# Altium PCB RS232.PcbDoc
Units mm, origin at the board's own origin, x right, y up, seen from the top; angles counter-clockwise.
Board outline 73.53 x 40.89 mm, 2 copper layers (Top Layer, Bottom Layer); 13 components, 21 nets, 53 pads, 20 vias.
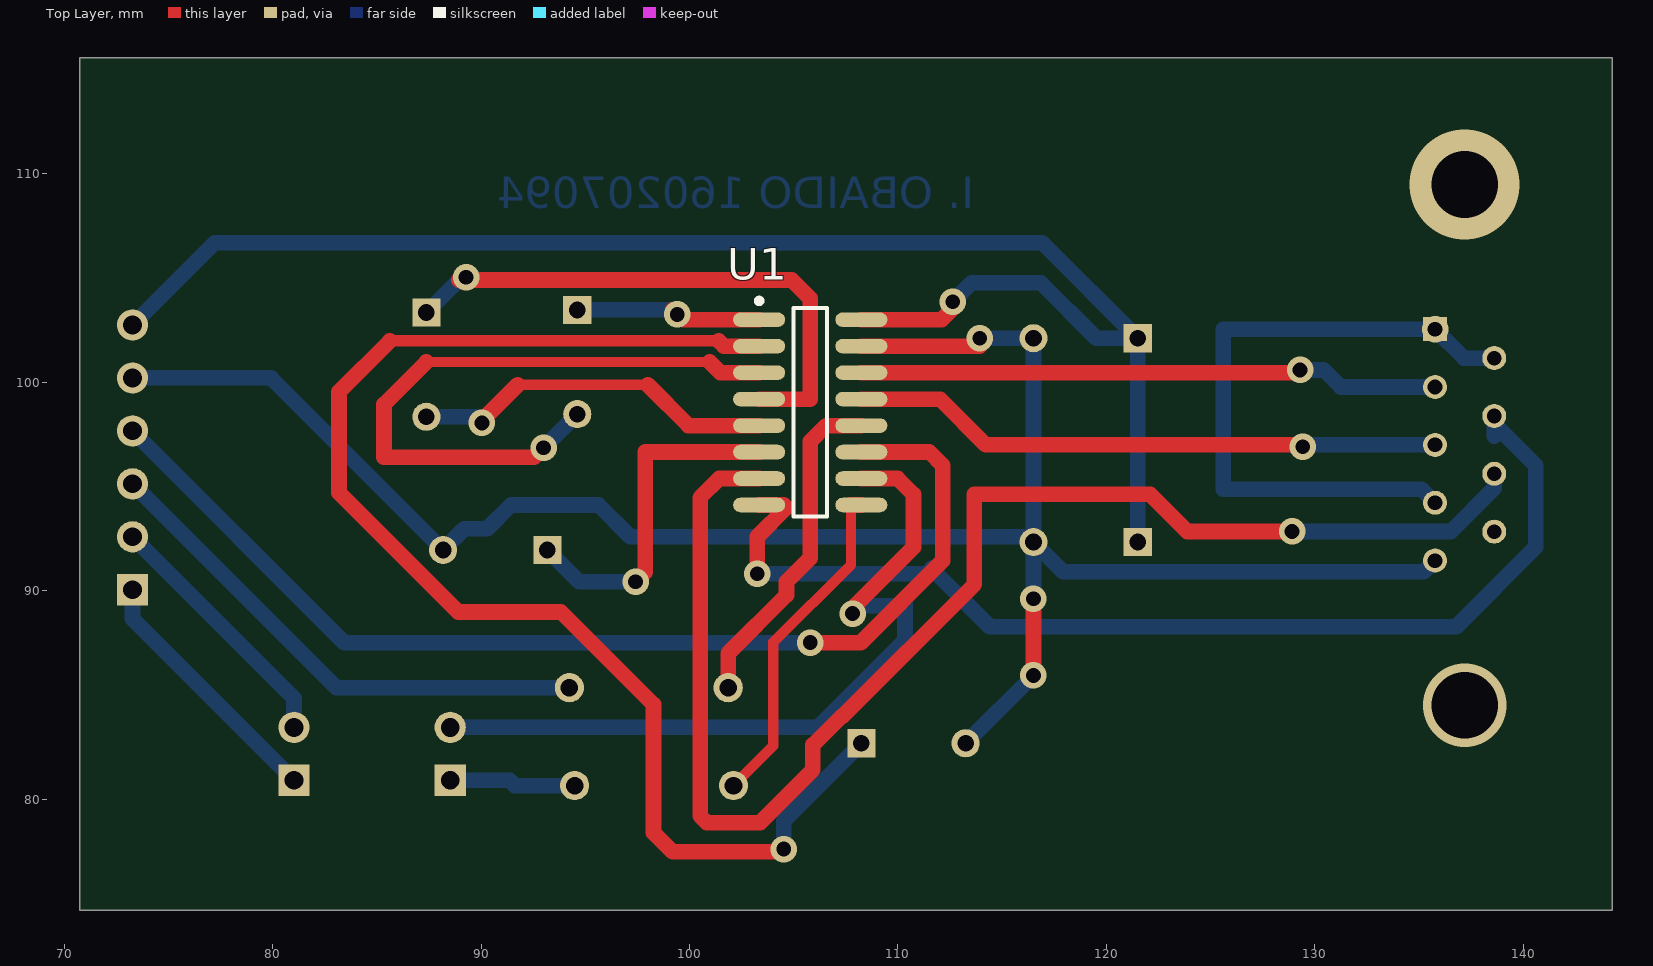
[diagram p0: Top Layer view]
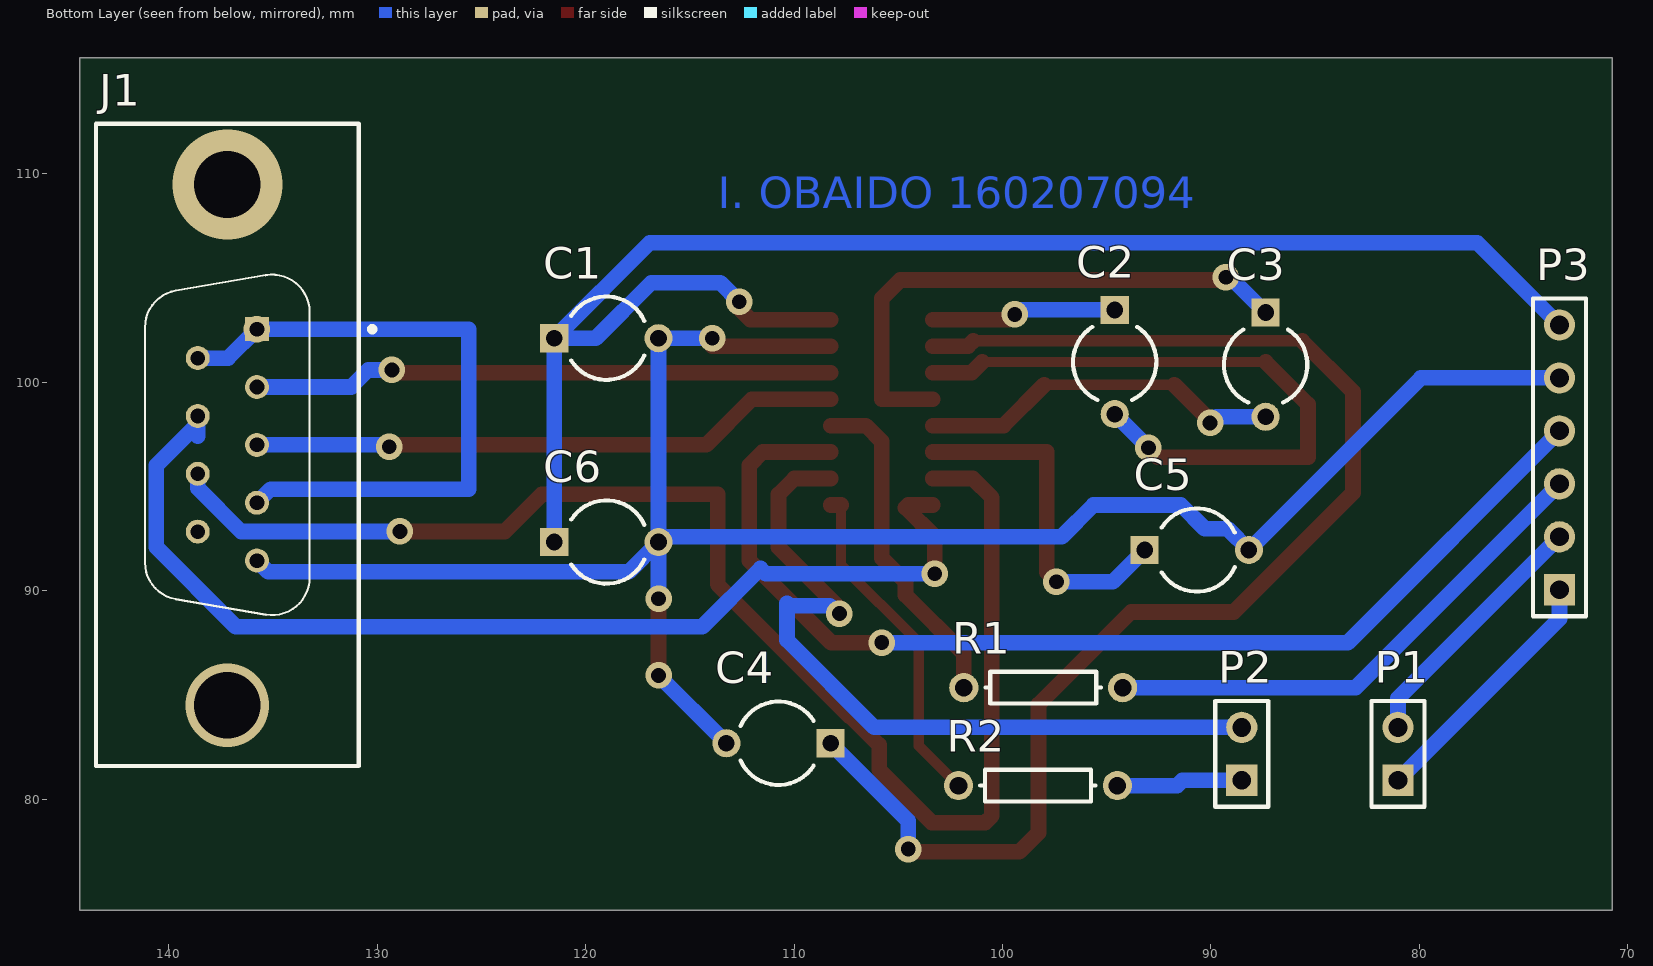
[diagram p1: Bottom Layer view, seen from below]

## Layer stack, top to bottom
Top Solder: solder mask 0.0102, Solder Resist, Dk 3.5
Top Layer: signal copper 0.0356
Dielectric 1: dielectric 0.32, FR-4, Dk 4.8
Bottom Layer: signal copper 0.0356
Bottom Solder: solder mask 0.0102, Solder Resist, Dk 3.5

## Board outline
70.739,74.676 144.272,74.676 144.272,115.57 70.739,115.57

## Design rules (kind name [scope] priority, off if disabled: settings)
Clearance [All] p1: gap=0.254 ignorepadtopadclearanceinfootprint=FALSE except(0: Arc-Hole Track-Hole SMDPad-Hole THPad-Hole Via-Hole Fill-Hole Poly-Hole Region-Hole Text-Hole)
PolygonConnect [All] p1: connectstyle=Relief reliefconductorwidth=0.254 reliefentries=4 polygonreliefangle="90 Angle" airgapwidth=0.254
RoutingVias [All] p1: holewidth=0.711 width=1.27 viastyle="Through Hole" minholewidth=0.711 minwidth=1.27 maxholewidth=0.711 maxwidth=1.27
SolderMaskExpansion [All] p1: expansion=0.102 istentingtop=FALSE
Width [All] p1: maxlimit=1.5 minlimit=0.5 preferedwidth=0.75 minimp=50.000000 maximp=50.000000 favimp=50.000000
30 further rules are at their usual default settings.

## Components (designator, comment, footprint, x,y, rotation, side; value= is the part's Value field where it differs from the comment)
C1 "Cap2" CAPR5-4X5 118.999,102.108 r180 bottom value=0.1uf
C2 "" CAPR5-4X5 94.615,100.965 r270 bottom value=0.1uf
C3 "" CAPR5-4X5 87.376,100.838 r270 bottom value=0.1uf
C4 "" CAPR5-4X5 110.744,82.677 r0 bottom value=0.1uf
C5 "" CAPR5-4X5 90.678,91.948 r180 bottom value=0.1uf
C6 "Cap2" CAPR5-4X5 118.999,92.329 r180 bottom
J1 "070906FS009F100ZU" 070906FS009 137.183,96.99 r270 bottom
P1 "Header 2" HDR1X2 81.026,80.899 r90 bottom
P2 "Header 2" HDR1X2 88.519,80.899 r90 bottom
P3 "Header 6" HDR1X6 73.279,90.043 r90 bottom
R1 "Res1" AXIAL-0.3 98.044,85.344 r0 bottom value=100
R2 "" AXIAL-0.3 98.298,80.645 r0 bottom value=100
U1 "MAX232ECWE+" SO16_L 105.791,98.552 r0 top

## Footprints (in the part's own frame and the unit in brackets; to place one, negate y for a bottom-side part, rotate by r counter-clockwise, add the part's x,y. Pads: shape width x height; smd on the part's side, far side on the other; paste and mask are expansions set on the pad)
070906FS009 [mm] "Connector; D-Sub, Thru-Hole; 9 Position; Vertical; Body 30.81x9.60mm (LxW)"
  rect 1.15x1.15 hole 0.7: 1(-5.55,1.42)
  round 1.15 hole 0.7: 2(-2.775,1.42) 3(0,1.42) 4(2.775,1.42) 5(5.55,1.42) 6(-4.163,-1.42) 7(-1.388,-1.42) 8(1.388,-1.42) 9(4.163,-1.42)
  round 2.9 hole 3.2: MH1(-12.495,0) MH2(12.495,0)
  silkscreen extent -15.4,-6.3 15.4,7.07, body extent -15.4,-6.3 15.4,6.3, height 8.4
AXIAL-0.3 [mm] "Axial Device, Thru-Hole; 2 Leads; 0.3 in Pin Spacing"
  round 1.4 hole 0.85: 1(-3.81,0) 2(3.81,0)
  silkscreen extent -2.77,-0.76 2.77,0.76
CAPR5-4X5 [mm] "Capacitor; 2 Leads"
  rect 1.35x1.35 hole 0.8: 1(-2.5,0)
  round 1.35 hole 0.8: 2(2.5,0)
  silkscreen extent -1.69,-2 1.82,2
HDR1X2 [mm] "Connector; Header; 2 Position"
  rect 1.5x1.5 hole 0.9: 1(0,0)
  round 1.5 hole 0.9: 2(2.54,0)
  silkscreen extent -1.27,-1.27 3.81,1.27
HDR1X6 [mm] "Connector; Header; 6 Position"
  rect 1.5x1.5 hole 0.9: 1(0,0)
  round 1.5 hole 0.9: 2(2.54,0) 3(5.08,0) 4(7.62,0) 5(10.16,0) 6(12.7,0)
  silkscreen extent -1.27,-1.27 13.97,1.27
SO16_L [mm] "SOIC, 16-Leads, Body 9.9x3.9mm, Pitch 1.27mm, IPC High Density"
  oval 2.5x0.7 smd: 1(-2.45,4.445) 2(-2.45,3.175) 3(-2.45,1.905) 4(-2.45,0.635) 5(-2.45,-0.635) 6(-2.45,-1.905) 7(-2.45,-3.175) 8(-2.45,-4.445) 9(2.45,-4.445) 10(2.45,-3.175) 11(2.45,-1.905) 12(2.45,-0.635) 13(2.45,0.635) 14(2.45,1.905) 15(2.45,3.175) 16(2.45,4.445)
  silkscreen extent -2.57,-5 0.8,5.47, body extent -2,-5 2,5, height 1.75

## Part data
C1 C6: "Capacitor", PackageDescription="Capacitor; 2 Leads", PackageReference=CAPR5-4X5, Published=23-Sep-2002, Publisher="Altium Limited"
  C6: =2.2uF
C2 C3 C4 C5: library part Cap2, "Capacitor", PackageDescription="Capacitor; 2 Leads", PackageReference=CAPR5-4X5, Published=23-Sep-2002, Publisher="Altium Limited"
J1: "Ultra Thin D-Sub, Straight Dip Type, Female Connector, THT, 9 Position, 2.2mm Pin Length", ComponentLink1Description="Manufacturer Link", ComponentLink1URL=http://www.suyin.com/, ComponentLink2Description=Datasheet, ComponentLink2URL=http://www.suyin.at/pdf/i_o/d_sub/female/straight/070906FS.pdf, DatasheetVersion=May-2003, DrillSize="Corresponds to nominal value.", PackageDescription="Connector; D-Sub, Thru-Hole; 9 Position; Vertical; Body 30.81 x 9.60 x 8.20 mm (LxWxH)", PackageReference=070906FS009, PackageVersion="revK, Nov-2007", PCB_Layout="Complies with manufacturer's recommendation.", Published=26-Sep-2008, Publisher="Altium Limited"
P1 P2: "Header, 2-Pin", LatestRevisionDate=17-Jul-2002, LatestRevisionNote="Re-released for DXP Platform.", Publisher="Altium Limited"
P3: "Header, 6-Pin", LatestRevisionDate=17-Jul-2002, LatestRevisionNote="Re-released for DXP Platform.", Publisher="Altium Limited"
R1: "Resistor", LatestRevisionDate=17-Jul-2002, LatestRevisionNote="Re-released for DXP Platform.", PackageDescription="Axial Device, Thru-Hole; 2 Leads; 0.3 in Pin Spacing", PackageReference=AXIAL-0.3, Published=8-Jun-2000, Publisher="Altium Limited"
R2: library part Res1, "Resistor", LatestRevisionDate=17-Jul-2002, LatestRevisionNote="Re-released for DXP Platform.", PackageDescription="Axial Device, Thru-Hole; 2 Leads; 0.3 in Pin Spacing", PackageReference=AXIAL-0.3, Published=8-Jun-2000, Publisher="Altium Limited"
U1: "Dual Transmitter/Receiver RS-232 16-Pin SOIC W", Package="SOIC-16 Maxim Integrated", Digi-Key_Part_Number=MAX232ECWE+-ND, Digi-Key_Purchase_URL=https://www.digikey.com.tr/product-detail/en/maxim-integrated/MAX232ECWE-/MAX232ECWE--ND/947838?utm_source=snapeda&utm_medium=aggregator&utm_campaign=symbol, MF="Maxim Integrated", MP=MAX232ECWE+, SnapEDA_Link=https://www.snapeda.com/parts/MAX232ECWE%2B/Maxim%20Integrated/view-part/?ref=snap

## Via types
v1: diameter 1.27, hole 0.711, Top Layer to Bottom Layer, 18 vias
v2: diameter 4, hole 0.711, Top Layer to Bottom Layer, 1 vias
v3: diameter 5.27, hole 0.711, Top Layer to Bottom Layer, 1 vias

## Nets (pads, with @x,y where several pads share a name; then routed paths per layer and width w, separated by ;. In a path a pad name is that pad's centre, name@x,y a point inside that pad or via, vN(x,y) a via of type N, cw(c..) or ccw(c..) an arc to the next point about the centre after c; other vN are vias at no path point)
GND: C1.2 C4.2 C5.2 C6.2 J1.5 P3.5 U1.15 | length 97.6
  Top Layer w0.75: U1.15 v1@113.919,101.727 ; v1(116.499,85.932) 116.499,89.488 116.379,89.488 v1(116.499,89.608)
  Bottom Layer w0.75: P3.5 79.923,100.203 C5.2 89.194,92.964 90.297,92.964 91.44,94.107 95.631,94.107 97.155,92.583 116.245,92.583 C6.2 ; C4.2 v1(116.499,85.932) ; v1(113.919,102.108) C1.2 C6.2 ; v1(116.499,89.608) C6.2 ; J1.5 135.23,90.907 117.921,90.907 C6.2
NetC1_1: C1.1 C6.1 P3.6 U1.16 | length 76.5
  Top Layer w0.75: U1.16 112.09,102.997 v1@112.624,103.53
  Bottom Layer w0.75: P3.6 77.216,106.68 116.927,106.68 C1.1 ; v1(112.624,103.861) 113.538,104.775 116.84,104.775 119.507,102.108 C1.1 ; C6.1 C1.1
NetC2_1: C2.1 U1.1 | length 8.9
  Top Layer w0.75: v1@99.198,103.465 99.666,102.997 U1.1
  Bottom Layer w0.75: C2.1 v1@99.198,103.465
  other v1: 99.412,103.251
NetC2_2: C2.2 U1.3 | length 31.7
  Top Layer w0.5: 87.376,100.965 100.965,100.965
  Top Layer w0.75: 87.376,100.965 85.344,98.933 85.344,96.393 92.543,96.393 v1(93,96.85) ; 100.965,100.965 101.473,100.457 U1.3
  Bottom Layer w0.75: v1(93,96.85) C2.2
NetC3_1: C3.1 U1.4 | length 26.7
  Top Layer w0.75: v1@88.94,104.902 104.902,104.902 105.791,104.013 105.791,99.187 U1.4
  Bottom Layer w0.75: C3.1 v1@88.94,104.902
  other v1: 89.281,105.029
NetC3_2: C3.2 U1.5 | length 17.4
  Top Layer w0.5: 91.756,99.873 97.993,99.873
  Top Layer w0.75: v1@90.221,98.338 91.756,99.873 ; 97.993,99.873 99.949,97.917 U1.5
  Bottom Layer w0.75: C3.2 89.749,98.338 v1(90.043,98.044)
NetC4_1: C4.1 U1.2 | length 64.9
  Top Layer w0.55: 85.623,101.981 101.397,101.981
  Top Layer w0.75: 85.623,101.981 83.185,99.543 83.185,94.691 88.9,88.976 93.828,88.976 98.269,84.535 98.269,78.388 99.187,77.47 104.394,77.47 v1(104.521,77.597) ; 101.397,101.981 101.651,101.727 U1.2
  Bottom Layer w0.75: v1(104.521,77.597) 104.521,78.954 C4.1
NetC5_1: C5.1 U1.6 | length 16.7
  Top Layer w0.75: v1(97.409,90.424) 97.877,90.892 97.877,96.647 U1.6
  Bottom Layer w0.75: C5.1 94.702,90.424 v1(97.409,90.424)
NetJ1_1: J1.1 J1.4 J1.6 | length 31.7
  Bottom Layer w0.75: J1.4 135.109,94.869 125.603,94.869 125.603,102.54 v1(135.763,102.54) 137.151,101.153 J1.6
NetJ1_2: J1.2 U1.14 | length 27.9
  Top Layer w0.75: U1.14 129.159,100.457 v1(129.286,100.584)
  Bottom Layer w0.75: v1(129.286,100.584) 130.429,100.584 131.248,99.765 J1.2
NetJ1_3: J1.3 U1.13 | length 28.5
  Top Layer w0.75: U1.13 112.014,99.187 114.211,96.99 v1@129.413,96.99
  Bottom Layer w0.75: v1(129.413,96.901) 129.502,96.99 J1.3
NetJ1_7: J1.7 U1.8 | length 53
  Top Layer w0.75: v1(103.251,90.805) 103.251,92.583 104.648,93.98 104.521,94.107 U1.8
  Bottom Layer w0.75: v1(103.251,90.805) 111.353,90.805 111.607,91.059 114.401,88.265 136.779,88.265 140.589,92.075 140.589,96.012 J1.7@138.603,97.998 ; 138.603,97.409 J1.7@138.603,97.998 ; J1.7 J1.7@138.603,97.998
NetJ1_8: J1.8 U1.7 | length 68.7
  Top Layer w0.75: U1.7 101.422,95.377 100.508,94.463 100.508,79.191 100.832,78.867 103.378,78.867 105.918,81.407 105.918,82.591 107.308,83.981 107.349,83.981 113.665,90.297 113.665,94.615 122.098,94.615 123.876,92.837 v1(128.905,92.837)
  Bottom Layer w0.75: v1(128.905,92.837) 136.525,92.837 138.603,94.915 J1.8
NetP1_1: P1.1 P3.1 | length 12.4
  Bottom Layer w0.75: P3.1 73.279,88.646 P1.1
NetP1_2: P1.2 P3.2 | length 12.4
  Bottom Layer w0.75: P3.2 81.026,84.836 P1.2
NetP2_1: P2.1 R2.1 | length 6.1
  Bottom Layer w0.75: P2.1 91.364,80.899 91.618,80.645 R2.1
NetP2_2: P2.2 U1.10 | length 37.8
  Top Layer w0.75: v1(107.823,88.9) 107.823,89.154 110.744,92.075 110.744,94.615 109.982,95.377 U1.10
  Bottom Layer w0.75: P2.2 106.147,83.439 110.338,87.63 110.338,89.383 110.236,89.281 108.28,89.281 107.899,88.9 v1(107.823,88.9)
NetP3_3: P3.3 R1.1 | length 25
  Bottom Layer w0.75: P3.3 83.058,85.344 R1.1
NetP3_4: P3.4 U1.11 | length 53.4
  Top Layer w0.75: v1(105.791,87.503) 108.214,87.503 112.141,91.43 112.141,96.012 111.506,96.647 U1.11
  Bottom Layer w0.75: P3.4 83.439,87.503 v1(105.791,87.503)
NetR1_2: R1.2 U1.12 | length 16.2
  Top Layer w0.75: R1.2 101.854,86.995 104.648,89.789 104.648,90.424 105.791,91.567 105.791,97.155 106.553,97.917 U1.12
NetR2_2: R2.2 U1.9 | length 16.3
  Top Layer w0.5: R2.2 104.013,82.55 104.013,87.513 107.747,91.246 U1.9@107.747,94.107
  Top Layer w0.75: U1.9@107.747,94.107 U1.9
pads on no net: J1.9 J1.MH1 J1.MH2
copper on no net:
  other v1: 137.16,84.201
  other v2: 137.183,84.495
  other v3: 137.183,109.485

## Other copper
Bottom Layer:
  text "I. OBAIDO 160207094" at 113.665,108.331 h1.52

## Silkscreen, mask and mechanical layers (free items; w line width, h text height)
Mechanical 1:
  text "X" at 141.986,113.538 h1.52
  text "X" at 71.247,113.411 h1.52
  text "X" at 71.374,75.565 h1.52
  text "X" at 141.859,75.311 h1.52